# Altium PCB GTU-V1.1-20160516 .PcbDoc (part 3 of 4)
Units mil, origin at the board's own origin, x right, y up, seen from the top; angles counter-clockwise.
Board outline 6299.21 x 4330.71 mil, 4 copper layers (Top Layer, POWER, GND, Bottom Layer); 208 components, 165 nets, 695 pads, 347 vias.
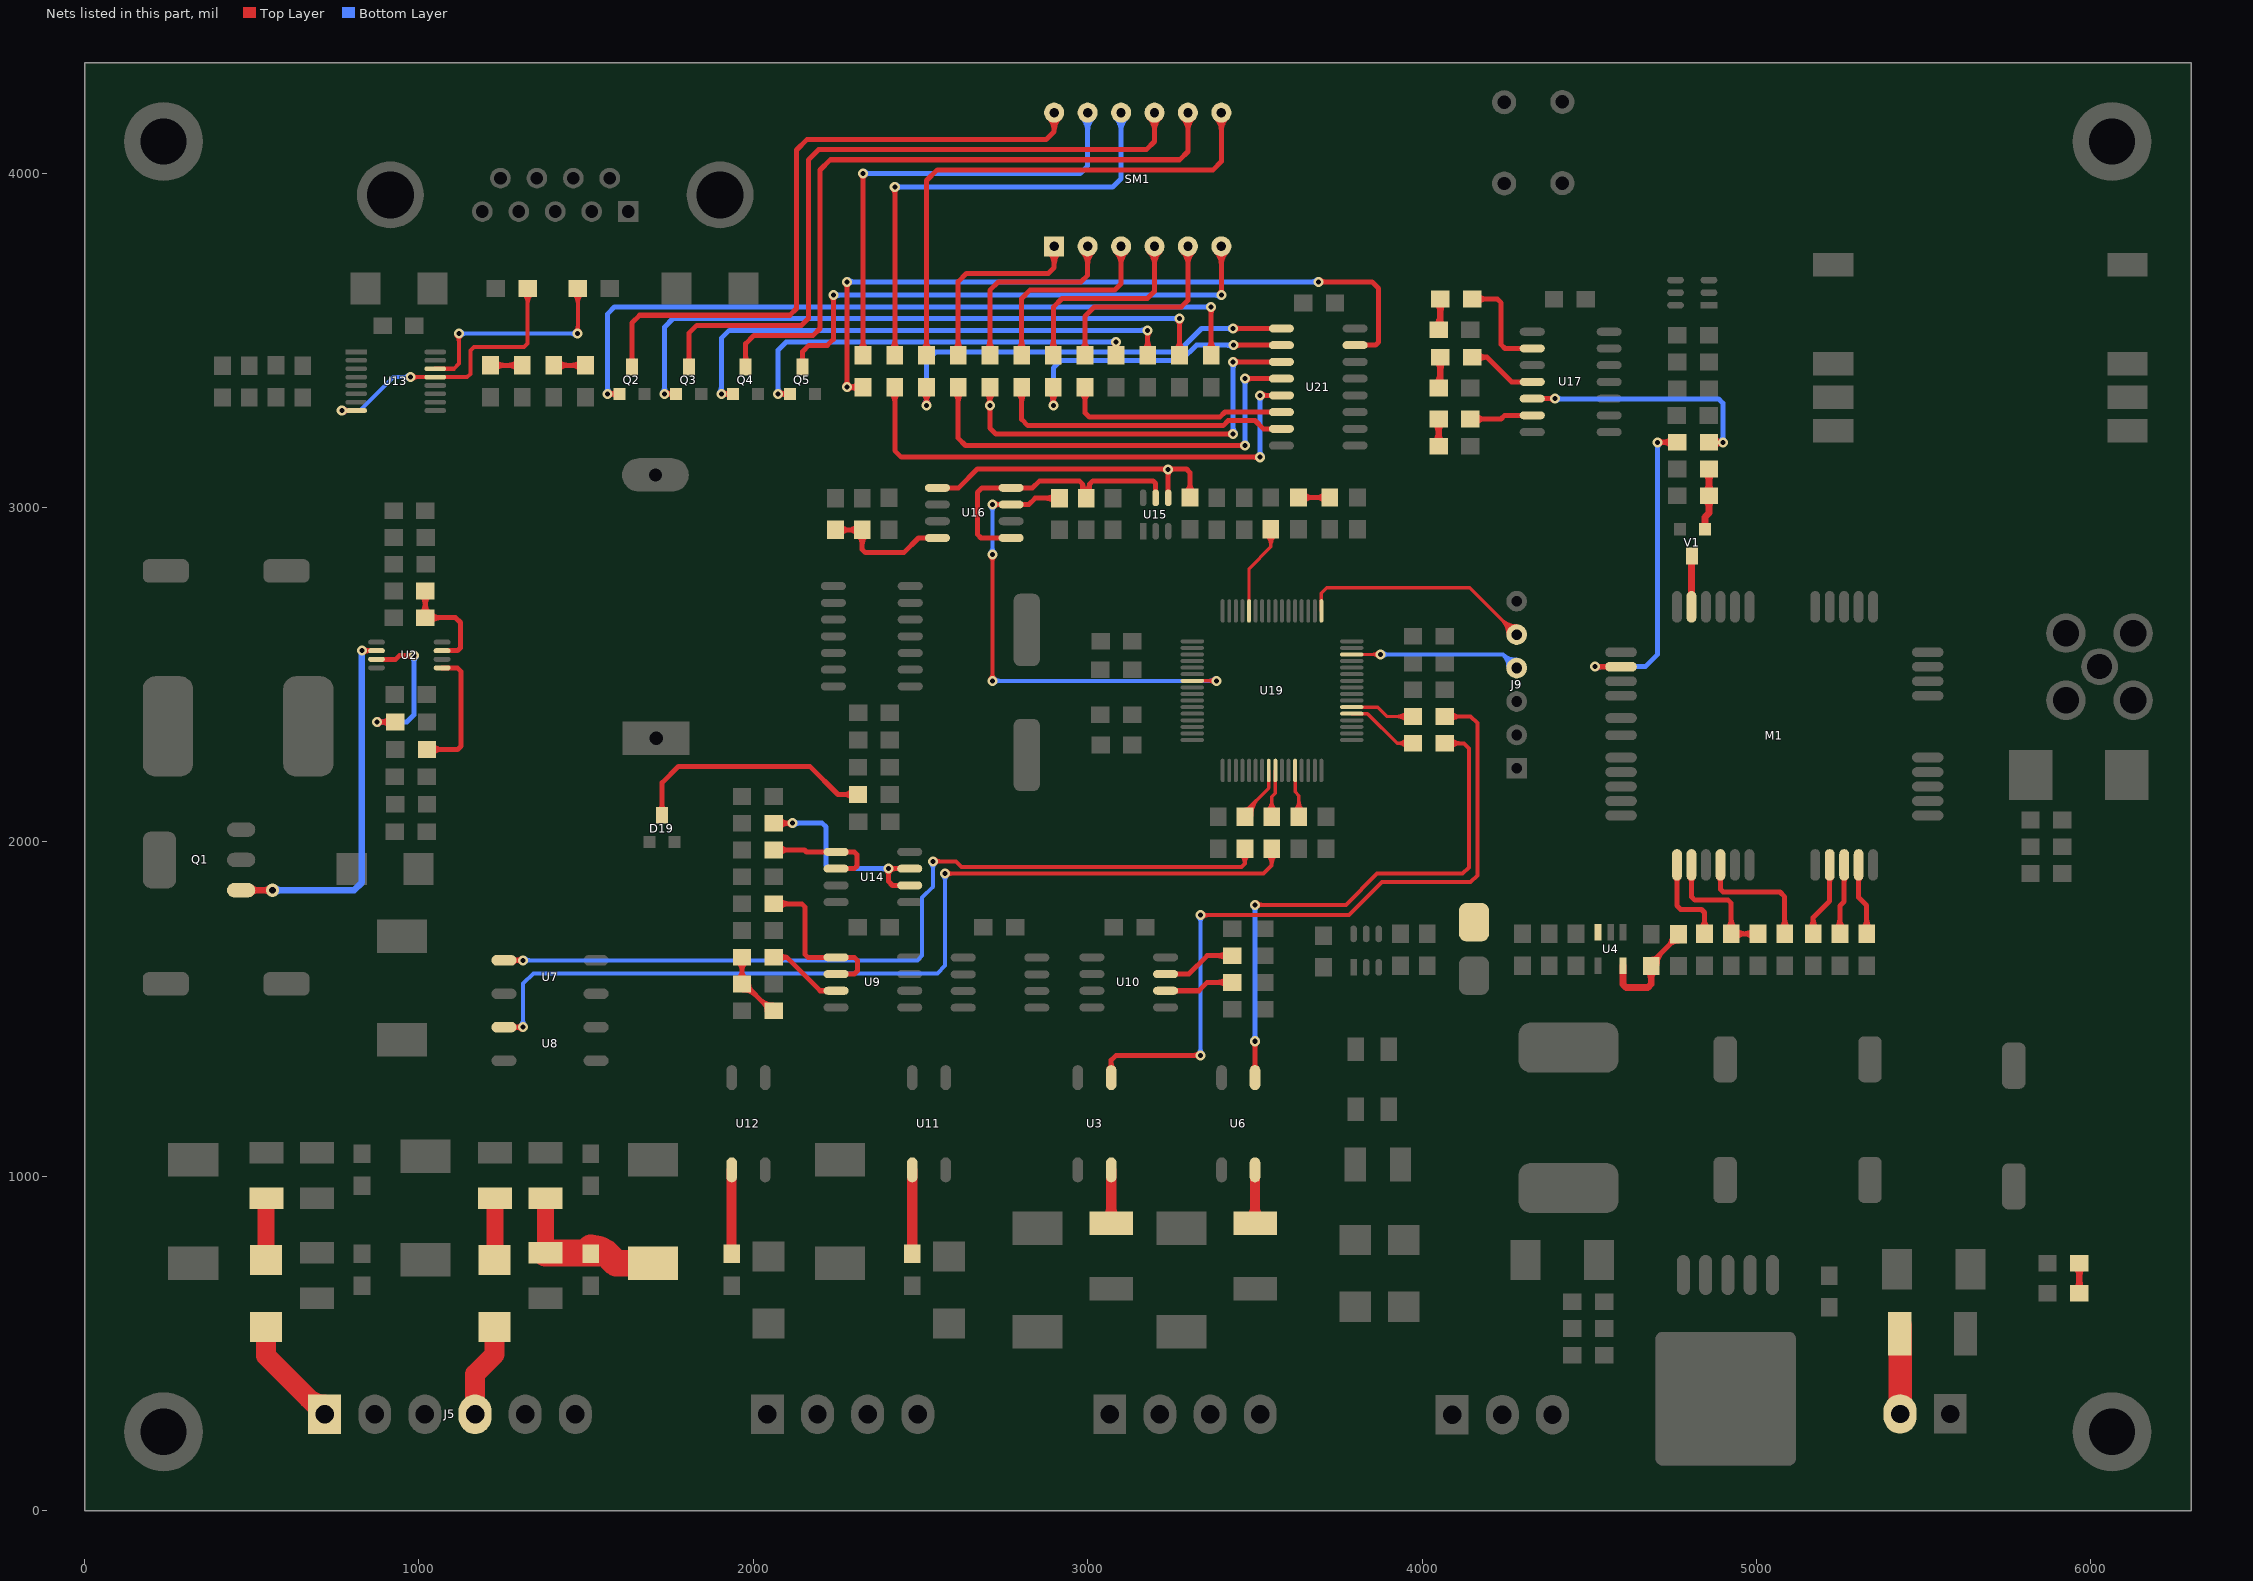
[diagram p5: the nets of this part, all layers, seen from the top]

## Via types
v1: diameter 30, hole 15, Top Layer to Bottom Layer, 261 vias
v2: diameter 40, hole 20, Top Layer to Bottom Layer, 39 vias
v3: diameter 40, hole 40, Top Layer to Bottom Layer, 16 vias
v4: diameter 80, hole 40, Top Layer to Bottom Layer, 14 vias
v5: diameter 50, hole 25, Top Layer to Bottom Layer, 9 vias
v6: diameter 60, hole 30, Top Layer to Bottom Layer, 7 vias
v7: diameter 70, hole 35, Top Layer to Bottom Layer, 1 vias

## Nets (pads, with @x,y where several pads share a name; then routed paths per layer and width w, separated by ;. In a path a pad name is that pad's centre, name@x,y a point inside that pad or via, vN(x,y) a via of type N, cw(c..) or ccw(c..) an arc to the next point about the centre after c; other vN are vias at no path point) (continued)
NetD16_A: D16.A R33.2 | length 259.8
  Top Layer w50: D16.A@528.46,764.14 ccw(c494.31,798.28) 542.6,798.28 ccw(c590.88,798.28) D16.A@556.74,764.14 ; D16.A@542.6,750 R33.2@542.6,934
NetD16_K: D16.K J5.1 | length 389.3
  Top Layer w60: D16.K@542.6,550 542.6,463.55 J5.1@717.76,288.39 ; 668.16,337.99 ccw(c717.76,387.59) J5.1@717.76,317.44
NetD17_A: D17.A R34.2 | length 259.8
  Top Layer w50: D17.A@1212.06,764.14 ccw(c1175.5,800.7) 1227.2,800.7 ; D17.A@1227.2,751 R34.2@1227.2,935 ; 1227.2,795.87 ccw(c1272.07,795.87) D17.A@1240.34,764.14
NetD17_K: D17.K J5.4 | length 246.4
  Top Layer w60: J5.4@1167.76,327.76 1167.76,408.55 1226.2,466.99 D17.K@1226.2,550
NetD18_K: D18.K R37.1 R38.2 R40.2 | length 629.6
  Top Layer w30: R37.1@1378.4,771 R37.1@1381.4,768
  Top Layer w50: R37.1@1378.4,771 R40.2@1378.4,935
  Top Layer w80: R37.1@1378.4,771 1559,771 1590,740 D18.K@1700.21,740 ; R38.2@1513.6,780.5 cw(c1513.6,693.83) 1574.89,755.11 ; R38.2@1513.6,785.5 cw(c1513.6,710.9) 1566.35,763.65
NetD19_3: D19.3 R77.2 | length 844.2
  Top Layer w15: D19.3@1719.79,2094.42 ccw(c1701.86,2112.35) 1727.21,2112.35 ccw(c1752.56,2112.35) D19.3@1734.64,2094.42 ; D19.3@1727.21,2080 1727.21,2177.21 1776,2226 2169,2226 2253,2142 R77.2@2313,2142 ; R77.2@2298.13,2129.63 ccw(c2268.25,2099.75) 2268.25,2142 ccw(c2268.25,2184.25) R77.2@2298.13,2154.37
NetJ1_2: J1.2 PTC1.1 | length 224.2
  Top Layer w70: J1.2@5429.05,328.76 PTC1.1@5429.05,553
NetJ9_4: J9.4 U19.46 | length 669.7
  Top Layer w10: U19.46@3789.61,2560.63 v1(3875.37,2560.63) ; v1@3868.3,2553.56 ccw(c3851.23,2536.49) 3851.23,2560.63 ccw(c3851.23,2584.77) v1@3868.3,2567.7
  Bottom Layer w12: v1(3875.37,2560.63) 4241.97,2560.63 ; v1@3881.73,2554.27 cw(c3897.1,2538.9) 3897.1,2560.63 cw(c3897.1,2582.36) v1@3881.73,2566.99 ; J9.4@4257.61,2520.89 ccw(c4204.12,2522.78) 4241.97,2560.63 ; J9.4@4281.71,2544.98 cw(c4279.82,2598.48) 4241.97,2560.63 ; J9.4@4282.6,2520 4241.97,2560.63
NetJ9_5: J9.5 U19.49 | length 860.7
  Top Layer w10: U19.49@3698.74,2690.87 3698.74,2743.74 3715,2760 4142.6,2760 J9.5@4282.6,2620 ; J9.5@4256.6,2620 ccw(c4193.83,2620) 4238.21,2664.38 ccw(c4282.6,2708.77) J9.5@4282.6,2646 ; J9.5@4266.6,2620 ccw(c4227.97,2620) 4255.28,2647.31 ccw(c4282.6,2674.63) J9.5@4282.6,2636
NetL3_1: L3.1 U4.3
NetLED1_1: LED1.1 R2.2 | length 203.8
  Top Layer w20: R2.2@5954.39,660.61 ccw(c5928.79,686.21) 5965,686.21 ccw(c6001.21,686.21) R2.2@5975.61,660.61 ; LED1.1@5954.39,729.39 cw(c5928.79,703.79) 5965,703.79 cw(c6001.21,703.79) LED1.1@5975.61,729.39 ; R2.2@5965,650 LED1.1@5965,740
NetLED2_1: LED2.1 R27.1 | length 227.6
  Top Layer w15: LED2.1@1403.38,3425 R27.1@1498.21,3425 ; LED2.1@1415.75,3412.63 cw(c1445.63,3382.75) 1445.63,3425 cw(c1445.63,3467.25) LED2.1@1415.75,3437.37 ; R27.1@1485.84,3412.63 ccw(c1455.96,3382.75) 1455.96,3425 ccw(c1455.96,3467.25) R27.1@1485.84,3437.37
NetLED3_1: LED3.1 R28.1 | length 227.6
  Top Layer w15: LED3.1@1213.71,3425 R28.1@1308.55,3425 ; LED3.1@1226.09,3412.63 cw(c1255.96,3382.75) 1255.96,3425 cw(c1255.96,3467.25) LED3.1@1226.09,3437.37 ; R28.1@1296.17,3412.63 ccw(c1266.3,3382.75) 1266.3,3425 ccw(c1266.3,3467.25) R28.1@1296.17,3437.37
NetLED4_1: LED4.1 U17.4 | length 276.1
  Top Layer w15: LED4.1@4149.21,3449.61 4193.6,3449.61 ; LED4.1@4164.16,3437.32 cw(c4193.6,3408.24) 4193.6,3449.61 ; LED4.1@4164.16,3461.91 ccw(c4193.6,3490.98) 4193.6,3449.61 ; U17.4@4329.21,3375.61 4267.6,3375.61 4193.6,3449.61
NetLED4_2: LED4.2 R58.1 | length 207.8
  Top Layer w20: R58.1@4041.11,3368.22 ccw(c4009.46,3399.86) 4054.21,3399.86 ; LED4.2@4043.61,3439.01 cw(c4018,3413.4) 4054.21,3413.4 cw(c4090.43,3413.4) LED4.2@4064.82,3439.01 ; R58.1@4049.21,3357.61 4054.21,3362.61 LED4.2@4054.21,3449.61 ; 4054.21,3387.79 ccw(c4081.89,3387.79) R58.1@4062.32,3368.22
NetLED5_1: LED5.1 U17.2 | length 380.9
  Top Layer w15: LED5.1@4149.21,3623.61 4224.6,3623.61 4236.21,3612 4236.21,3487 4247.6,3475.61 U17.2@4329.21,3475.61 ; LED5.1@4164.09,3611.24 cw(c4193.96,3581.37) 4193.96,3623.61 cw(c4193.96,3665.86) LED5.1@4164.09,3635.99
NetLED5_2: LED5.2 R59.1 | length 207.8
  Top Layer w20: R59.1@4041.11,3542.22 ccw(c4009.46,3573.86) 4054.21,3573.86 ; LED5.2@4043.61,3613.01 cw(c4018,3587.4) 4054.21,3587.4 cw(c4090.43,3587.4) LED5.2@4064.82,3613.01 ; R59.1@4049.21,3531.61 4054.21,3536.61 LED5.2@4054.21,3623.61 ; 4054.21,3561.79 ccw(c4081.89,3561.79) R59.1@4062.32,3542.22
NetLED6_1: LED6.1 R57.2 | length 194.8
  Top Layer w20: R57.2@4038.61,3194.22 ccw(c4013,3219.83) 4049.21,3219.83 ccw(c4085.43,3219.83) R57.2@4059.82,3194.22 ; LED6.1@4038.61,3254.01 cw(c4013,3228.4) 4049.21,3228.4 cw(c4085.43,3228.4) LED6.1@4059.82,3254.01 ; R57.2@4049.21,3183.61 LED6.1@4049.21,3264.61
NetLED6_2: LED6.2 U17.6 | length 255.9
  Top Layer w15: LED6.2@4144.21,3264.61 4235.83,3264.61 4246.83,3275.61 U17.6@4329.21,3275.61 ; LED6.2@4159.09,3252.24 cw(c4188.96,3222.37) 4188.96,3264.61 cw(c4188.96,3306.86) LED6.2@4159.09,3276.99
NetLED7_1: LED7.1 R71.1 | length 226.5
  Top Layer w15: LED7.1@3630.1,3030 R71.1@3723.85,3030 ; LED7.1@3642.47,3017.63 cw(c3672.35,2987.75) 3672.35,3030 cw(c3672.35,3072.25) LED7.1@3642.47,3042.37 ; R71.1@3711.47,3017.63 ccw(c3681.6,2987.75) 3681.6,3030 ccw(c3681.6,3072.25) R71.1@3711.47,3042.37
NetM1_10: M1.10 V1.3 | length 174.3
  Top Layer w20: M1.10@4805.29,2703 4805.29,2852.69 V1.3@4807.6,2855 ; 4805.29,2823.12 cw(c4832.48,2823.12) V1.3@4813.26,2842.34
NetM1_13: M1.13 R56.1 | length 1181.8
  Top Layer w15: v1@4516.21,2523.87 M1.13@4594.66,2523.87 ; v1@4521.52,2518.7 cw(c4534,2506.22) 4534,2523.87 ; v1@4521.52,2529.3 ccw(c4534.64,2542.43) 4534.64,2523.87 ; M1.13@4557.04,2518.73 ccw(c4544.64,2506.33) 4544.64,2523.87 ccw(c4544.64,2541.4) M1.13@4557.04,2529 ; v1(4704.21,3195) R56.1@4762.6,3195 ; v1@4709.52,3189.7 cw(c4722.32,3176.89) 4722.32,3195 cw(c4722.32,3213.11) v1@4709.52,3200.3 ; R56.1@4747.72,3182.63 ccw(c4717.85,3152.75) 4717.85,3195 ccw(c4717.85,3237.25) R56.1@4747.72,3207.37
  Bottom Layer w15: v1(4516.21,2524) 4667.21,2524 4704.21,2561 v1(4704.21,3195) ; v1@4521.52,2518.7 cw(c4534.32,2505.89) 4534.32,2524 cw(c4534.32,2542.11) v1@4521.52,2529.3 ; v1@4698.91,3189.7 cw(c4686.11,3176.89) 4704.21,3176.89 cw(c4722.32,3176.89) v1@4709.52,3189.7
NetM1_21: M1.21 R52.1 | length 370.6
  Top Layer w15: M1.21@4756.85,1893.73 cw(c4744.45,1881.33) 4761.98,1881.33 cw(c4779.52,1881.33) M1.21@4767.12,1893.73 ; M1.21@4761.98,1931.35 4761.98,1809.23 4773.21,1798 4835.21,1798 4844.21,1789 R52.1@4844.21,1725 ; R52.1@4831.84,1739.87 ccw(c4801.96,1769.75) 4844.21,1769.75 ccw(c4886.46,1769.75) R52.1@4856.59,1739.87
NetM1_22: M1.22 R51.1 R54.2 | length 620.8
  Top Layer w15: M1.22@4800.16,1893.73 cw(c4787.75,1881.33) 4805.29,1881.33 cw(c4822.83,1881.33) M1.22@4810.43,1893.73 ; M1.22@4805.29,1931.35 4805.29,1835.92 4815.21,1826 4915.21,1826 4924.21,1817 R54.2@4924.21,1725 R51.1@5004.21,1725 ; R54.2@4911.84,1739.87 ccw(c4881.96,1769.75) 4924.21,1769.75 ccw(c4966.46,1769.75) R54.2@4936.59,1739.87 ; R54.2@4936.59,1712.63 cw(c4966.46,1682.75) 4966.46,1725 cw(c4966.46,1767.25) R54.2@4936.59,1737.37 ; R51.1@4991.84,1712.63 ccw(c4961.96,1682.75) 4961.96,1725 ccw(c4961.96,1767.25) R51.1@4991.84,1737.37
NetM1_24: M1.24 R50.1 | length 479.5
  Top Layer w15: M1.24@4886.77,1893.73 cw(c4874.37,1881.33) 4891.91,1881.33 cw(c4909.44,1881.33) M1.24@4897.04,1893.73 ; M1.24@4891.91,1931.35 4891.91,1858.31 4899.91,1850.31 5069.91,1850.31 5084.21,1836 R50.1@5084.21,1725 ; R50.1@5071.84,1739.87 ccw(c5041.96,1769.75) 5084.21,1769.75 ccw(c5126.46,1769.75) R50.1@5096.59,1739.87
NetM1_28: M1.28 R48.1 | length 320.7
  Top Layer w15: R48.1@5156.84,1739.87 ccw(c5126.96,1769.75) 5169.21,1769.75 ccw(c5211.46,1769.75) R48.1@5181.59,1739.87 ; R48.1@5169.21,1725 5169.21,1774 5218.68,1823.46 M1.28@5218.68,1931.35 ; M1.28@5213.54,1893.73 cw(c5201.14,1881.33) 5218.68,1881.33 cw(c5236.21,1881.33) M1.28@5223.81,1893.73
NetM1_29: M1.29 R45.1 | length 305.5
  Top Layer w15: R45.1@5236.84,1739.87 ccw(c5206.96,1769.75) 5249.21,1769.75 ccw(c5291.46,1769.75) R45.1@5261.59,1739.87 ; R45.1@5249.21,1725 5249.21,1809 5261.98,1821.77 M1.29@5261.98,1931.35 ; M1.29@5256.85,1893.73 cw(c5244.45,1881.33) 5261.98,1881.33 cw(c5279.52,1881.33) M1.29@5267.12,1893.73
NetM1_30: M1.30 R42.1 | length 310.2
  Top Layer w15: M1.30@5300.16,1893.73 cw(c5287.75,1881.33) 5305.29,1881.33 cw(c5322.83,1881.33) M1.30@5310.43,1893.73 ; M1.30@5305.29,1931.35 5305.29,1833.92 5329.21,1810 R42.1@5329.21,1725 ; R42.1@5316.84,1739.87 ccw(c5286.96,1769.75) 5329.21,1769.75 ccw(c5371.46,1769.75) R42.1@5341.59,1739.87
NetPTC2_1: PTC2.1 U3.6 | length 235.3
  Top Layer w30: PTC2.1@3056.07,874.14 ccw(c3021.93,908.28) 3070.21,908.28 ccw(c3118.5,908.28) PTC2.1@3084.35,874.14 ; PTC2.1@3070.21,860 U3.6@3070.21,1019.41
NetPTC3_1: PTC3.1 U6.6 | length 235.3
  Top Layer w30: PTC3.1@3486.07,874.14 ccw(c3451.93,908.28) 3500.21,908.28 ccw(c3548.5,908.28) PTC3.1@3514.35,874.14 ; PTC3.1@3500.21,860 U6.6@3500.21,1019.41
NetQ1_1: Q1.1 U2.6 | length 1255.7
  Top Layer w15: v1(829.42,2571.8) U2.6@873.21,2571.8 ; v1@834.72,2566.49 cw(c847.52,2553.69) 847.52,2571.8 cw(c847.52,2589.9) v1@834.72,2577.1
  Top Layer w20: Q1.1@468.31,1855.61 v2(562.21,1855.61) ; Q1.1@497.22,1847.37 cw(c517.11,1827.48) 517.11,1855.61 cw(c517.11,1883.75) Q1.1@497.22,1863.85 ; v2@555.14,1848.54 ccw(c538.07,1831.47) 538.07,1855.61 ccw(c538.07,1879.76) v2@555.14,1862.69
  Bottom Layer w20: v2(562.21,1855.61) 805.83,1855.61 829.42,1879.2 v1(829.42,2571.8) ; v2@569.28,1848.54 cw(c586.35,1831.47) 586.35,1855.61 cw(c586.35,1879.76) v2@569.28,1862.69
NetQ2_1: Q2.1 R62.2 | length 2452.8
  Top Layer w15: v1(1564.21,3340) Q2.1@1599.21,3340 ; v1@1569.52,3334.7 cw(c1582.32,3321.89) 1582.32,3340 cw(c1582.32,3358.11) v1@1569.52,3345.3 ; Q2.1@1591.79,3332.58 ccw(c1573.86,3314.65) 1573.86,3340 ccw(c1573.86,3365.35) Q2.1@1591.79,3347.42 ; R62.2@3356.84,3469.87 ccw(c3326.96,3499.75) 3369.21,3499.75 ccw(c3411.46,3499.75) R62.2@3381.59,3469.87 ; v1@3363.91,3594.7 cw(c3351.11,3581.89) 3369.21,3581.89 cw(c3387.32,3581.89) v1@3374.52,3594.7 ; R62.2@3369.21,3455 v1(3369.21,3600)
  Bottom Layer w15: v1@1558.91,3345.3 ccw(c1546.11,3358.11) 1564.21,3358.11 ccw(c1582.32,3358.11) v1@1569.52,3345.3 ; v1(1564.21,3340) 1564.21,3579.21 1585,3600 v1(3369.21,3600) ; v1@3363.91,3594.7 ccw(c3351.11,3581.89) 3351.11,3600 ccw(c3351.11,3618.11) v1@3363.91,3605.3
NetQ2_3: Q2.3 SM1.12 | length 2090.9
  Top Layer w15: Q2.3@1629.79,3434.42 ccw(c1611.86,3452.35) 1637.21,3452.35 ccw(c1662.56,3452.35) Q2.3@1644.64,3434.42 ; Q2.3@1637.21,3420 1637.21,3552.21 1660,3575 2109,3575 2129.21,3595.21 2129.21,4069.21 2160,4100 2875,4100 2899.6,4124.6 SM1.12@2899.6,4181 ; SM1.12@2883.69,4165.09 cw(c2845.28,4126.68) 2899.6,4126.68 cw(c2953.92,4126.68) SM1.12@2915.51,4165.09
NetQ3_1: Q3.1 R63.2 | length 2114.8
  Top Layer w15: v1(1734.21,3340) Q3.1@1769.21,3340 ; v1@1739.52,3334.7 cw(c1752.32,3321.89) 1752.32,3340 cw(c1752.32,3358.11) v1@1739.52,3345.3 ; Q3.1@1761.79,3332.58 ccw(c1743.86,3314.65) 1743.86,3340 ccw(c1743.86,3365.35) Q3.1@1761.79,3347.42 ; R63.2@3261.84,3469.87 ccw(c3231.96,3499.75) 3274.21,3499.75 ccw(c3316.46,3499.75) R63.2@3286.59,3469.87 ; v1@3268.91,3559.7 cw(c3256.11,3546.89) 3274.21,3546.89 cw(c3292.32,3546.89) v1@3279.52,3559.7 ; R63.2@3274.21,3455 v1(3274.21,3565)
  Bottom Layer w15: v1@1728.91,3345.3 ccw(c1716.11,3358.11) 1734.21,3358.11 ccw(c1752.32,3358.11) v1@1739.52,3345.3 ; v1(1734.21,3340) 1734.21,3539.21 1760,3565 v1(3274.21,3565) ; v1@3268.91,3559.7 ccw(c3256.11,3546.89) 3256.11,3565 ccw(c3256.11,3583.11) v1@3268.91,3570.3
NetQ3_3: Q3.3 SM1.9 | length 2220.3
  Top Layer w15: Q3.3@1799.79,3434.42 ccw(c1781.86,3452.35) 1807.21,3452.35 ccw(c1832.56,3452.35) Q3.3@1814.64,3434.42 ; Q3.3@1807.21,3420 1807.21,3521.21 1831,3545 2144,3545 2164.21,3565.21 2164.21,4039.21 2195,4070 3175,4070 3199.6,4094.6 SM1.9@3199.6,4181 ; SM1.9@3183.69,4165.09 cw(c3145.28,4126.68) 3199.6,4126.68 cw(c3253.92,4126.68) SM1.9@3215.51,4165.09
NetQ4_1: Q4.1 R69.2 | length 1781
  Top Layer w15: v1(1904.21,3340) Q4.1@1939.21,3340 ; v1@1909.52,3334.7 cw(c1922.32,3321.89) 1922.32,3340 cw(c1922.32,3358.11) v1@1909.52,3345.3 ; Q4.1@1931.79,3332.58 ccw(c1913.86,3314.65) 1913.86,3340 ccw(c1913.86,3365.35) Q4.1@1931.79,3347.42 ; R69.2@3166.84,3469.87 ccw(c3136.96,3499.75) 3179.21,3499.75 ccw(c3221.46,3499.75) R69.2@3191.59,3469.87 ; v1@3173.91,3524.7 cw(c3161.11,3511.89) 3179.21,3511.89 cw(c3197.32,3511.89) v1@3184.52,3524.7 ; R69.2@3179.21,3455 v1(3179.21,3530)
  Bottom Layer w15: v1@1898.91,3345.3 ccw(c1886.11,3358.11) 1904.21,3358.11 ccw(c1922.32,3358.11) v1@1909.52,3345.3 ; v1(1904.21,3340) 1904.21,3506.21 1928,3530 v1(3179.21,3530) ; v1@3173.91,3524.7 ccw(c3161.11,3511.89) 3161.11,3530 ccw(c3161.11,3548.11) v1@3173.91,3535.3
NetQ4_3: Q4.3 SM1.8 | length 2149.7
  Top Layer w15: Q4.3@1969.79,3434.42 ccw(c1951.86,3452.35) 1977.21,3452.35 ccw(c2002.56,3452.35) Q4.3@1984.64,3434.42 ; Q4.3@1977.21,3420 1977.21,3490.21 2002,3515 2179,3515 2199.21,3535.21 2199.21,4009.21 2230,4040 3275,4040 3299.6,4064.6 SM1.8@3299.6,4181 ; SM1.8@3283.69,4165.09 cw(c3245.28,4126.68) 3299.6,4126.68 cw(c3353.92,4126.68) SM1.8@3315.51,4165.09
NetQ5_1: Q5.1 R74.2 | length 1434.5
  Top Layer w15: v1(2074.21,3340) Q5.1@2109.21,3340 ; v1@2079.52,3334.7 cw(c2092.32,3321.89) 2092.32,3340 cw(c2092.32,3358.11) v1@2079.52,3345.3 ; Q5.1@2101.79,3332.58 ccw(c2083.86,3314.65) 2083.86,3340 ccw(c2083.86,3365.35) Q5.1@2101.79,3347.42 ; R74.2@3072.97,3470.91 ccw(c3052.79,3495) v1(3084.21,3495) ; v1@3078.91,3489.7 cw(c3066.11,3476.89) 3084.21,3476.89 cw(c3102.32,3476.89) v1@3089.52,3489.7 ; R74.2@3084.21,3455 v1(3084.21,3495) ; R74.2@3095.45,3470.91 cw(c3115.64,3495) v1(3084.21,3495)
  Bottom Layer w15: v1@2068.91,3345.3 ccw(c2056.11,3358.11) 2074.21,3358.11 ccw(c2092.32,3358.11) v1@2079.52,3345.3 ; v1(2074.21,3340) 2074.21,3471.21 2098,3495 v1(3084.21,3495) ; v1@3078.91,3489.7 ccw(c3066.11,3476.89) 3066.11,3495 ccw(c3066.11,3513.11) v1@3078.91,3500.3
NetQ5_3: Q5.3 SM1.6 | length 1815.6
  Top Layer w15: Q5.3@2139.79,3434.42 ccw(c2121.86,3452.35) 2147.21,3452.35 ccw(c2172.56,3452.35) Q5.3@2154.64,3434.42 ; Q5.3@2147.21,3420 2147.21,3466.21 2166,3485 2221,3485 2239.21,3503.21 v1(2239.21,3635) ; v1@2233.91,3629.7 cw(c2221.11,3616.89) 2239.21,3616.89 cw(c2257.32,3616.89) v1@2244.52,3629.7 ; SM1.6@3383.69,3765.09 cw(c3345.28,3726.68) 3399.6,3726.68 cw(c3453.92,3726.68) SM1.6@3415.51,3765.09 ; v1@3394.3,3640.3 ccw(c3381.49,3653.11) 3399.6,3653.11 ccw(c3417.7,3653.11) v1@3404.9,3640.3 ; v1(3399.6,3635) SM1.6@3399.6,3781
  Bottom Layer w15: v1@2244.52,3629.7 cw(c2257.32,3616.89) 2257.32,3635 cw(c2257.32,3653.11) v1@2244.52,3640.3 ; 2254.21,3635 v1(3399.6,3635) ; v1@3394.3,3629.7 ccw(c3381.49,3616.89) 3381.49,3635 ccw(c3381.49,3653.11) v1@3394.3,3640.3
NetR3_1: R3.1 U2.1 | length 456.5
  Top Layer w15: R3.1@1024.21,2276.61 1115.83,2276.61 1126.21,2287 1126.21,2509 1114.6,2520.61 U2.1@1069.21,2520.61 ; R3.1@1039.09,2264.24 cw(c1068.96,2234.37) 1068.96,2276.61 cw(c1068.96,2318.86) R3.1@1039.09,2288.99
NetR4_1: R4.1 R6.2 U2.3 | length 524.2
  Top Layer w15: R6.2@1006.84,2682.99 ccw(c976.96,2712.86) 1019.21,2712.86 ccw(c1061.46,2712.86) R6.2@1031.59,2682.99 ; R4.1@1006.84,2738.24 cw(c976.96,2708.37) 1019.21,2708.37 cw(c1061.46,2708.37) R4.1@1031.59,2738.24 ; R4.1@1019.21,2750.61 R6.2@1019.21,2670.61 1109.6,2670.61 1124.21,2656 1124.21,2580.61 1115.39,2571.8 U2.3@1069.21,2571.8 ; R6.2@1034.09,2658.24 cw(c1063.96,2628.37) 1063.96,2670.61 cw(c1063.96,2712.86) R6.2@1034.09,2682.99
NetR7_2: R7.2 U2.7 | length 653.2
  Top Layer w15: v1@871.83,2358.61 R7.2@929.21,2358.61 ; U2.7@873.21,2546.2 930.42,2546.2 941.21,2557 v1(985.21,2557) ; v1@880.13,2353.31 cw(c892.93,2340.51) 892.93,2358.61 cw(c892.93,2376.72) v1@880.13,2363.92 ; R7.2@914.34,2346.24 ccw(c884.46,2316.37) 884.46,2358.61 ccw(c884.46,2400.86) R7.2@914.34,2370.99 ; v1@979.91,2551.7 ccw(c967.11,2538.89) 967.11,2557 ccw(c967.11,2575.11) v1@979.91,2562.3
  Bottom Layer w15: v1@871.83,2358.61 963.83,2358.61 985.21,2380 v1(985.21,2557) ; v1@880.13,2353.31 cw(c892.93,2340.51) 892.93,2358.61 cw(c892.93,2376.72) v1@880.13,2363.92 ; v1@979.91,2551.7 cw(c967.11,2538.89) 985.21,2538.89 cw(c1003.32,2538.89) v1@990.52,2551.7
  other v1: 874.83,2358.61
NetR10_2: R10.2 U3.1 | length 2418.2
  Top Layer w12: v1(3337,1781) 3781,1781 3880,1880 4145,1880 4165,1900 4165,2355 4145,2375 R10.2@4067.6,2375 ; v1@3343.36,1774.64 cw(c3358.73,1759.27) 3358.73,1781 cw(c3358.73,1802.73) v1@3343.36,1787.36 ; R10.2@4083.53,2361.56 cw(c4115.97,2329.13) 4115.97,2375 cw(c4115.97,2420.87) R10.2@4083.53,2388.44
  Top Layer w15: U3.1@3064.2,1322.51 ccw(c3049.69,1337.02) 3070.21,1337.02 ccw(c3090.73,1337.02) U3.1@3076.22,1322.51 ; U3.1@3070.21,1295 3070.21,1347.21 3085,1362 v1(3337,1362) ; v1@3331.7,1356.7 ccw(c3318.89,1343.89) 3318.89,1362 ccw(c3318.89,1380.11) v1@3331.7,1367.3
  Bottom Layer w12: v1@3330.64,1368.36 ccw(c3315.27,1383.73) 3337,1383.73 ccw(c3358.73,1383.73) v1@3343.36,1368.36 ; v1@3330.64,1774.64 cw(c3315.27,1759.27) 3337,1759.27 cw(c3358.73,1759.27) v1@3343.36,1774.64 ; v1(3337,1362) v1@3337,1782
NetR11_2: R11.2 R12.1 U4.5 | length 520
  Top Layer w15: R11.2@4685,1637.79 R12.1@4766.21,1719 ; R11.2@4685,1649 ccw(c4685,1676.07) 4704.14,1656.93 ; R11.2@4702.5,1631.5 cw(c4759.93,1631.5) 4719.32,1672.11 ; 4734.57,1687.36 ccw(c4700.43,1721.5) R12.1@4748.71,1721.5 ; 4740.61,1693.39 cw(c4766.21,1667.79) R12.1@4766.21,1704
  Top Layer w20: U4.5@4600.83,1629.78 4600.83,1574.17 4610,1565 4675,1565 4685,1575 R11.2@4685,1642.79 ; R11.2@4674.39,1615.89 cw(c4648.79,1590.29) 4685,1590.29 cw(c4721.21,1590.29) R11.2@4695.61,1615.89
NetR13_2: R13.2 U6.1 | length 1861.5
  Top Layer w12: v1(3500.21,1812) 3772,1812 3865,1905 4121,1905 4140,1924 4140,2280 4125,2295 R13.2@4067.6,2295 ; v1@3506.58,1805.64 cw(c3521.94,1790.27) 3521.94,1812 cw(c3521.94,1833.73) v1@3506.58,1818.36 ; R13.2@4083.53,2281.56 cw(c4115.97,2249.13) 4115.97,2295 cw(c4115.97,2340.87) R13.2@4083.53,2308.44
  Top Layer w15: U6.1@3494.2,1322.51 ccw(c3479.69,1337.02) 3500.21,1337.02 ccw(c3520.73,1337.02) U6.1@3506.22,1322.51 ; v1@3494.91,1398.7 cw(c3482.11,1385.89) 3500.21,1385.89 cw(c3518.32,1385.89) v1@3505.52,1398.7 ; U6.1@3500.21,1295 v1(3500.21,1404)
  Bottom Layer w15: v1@3494.91,1409.3 ccw(c3482.11,1422.11) 3500.21,1422.11 ccw(c3518.32,1422.11) v1@3505.52,1409.3 ; v1@3494.91,1806.7 cw(c3482.11,1793.89) 3500.21,1793.89 cw(c3518.32,1793.89) v1@3505.52,1806.7 ; v1(3500.21,1404) v1(3500.21,1812)
NetR14_2: R14.2 U7.1 | length 2768
  Top Layer w12: v1(2537,1942) 2606,1942 2623,1925 3460,1925 3470,1935 ; v1@2543.36,1935.64 cw(c2558.73,1920.27) 2558.73,1942 cw(c2558.73,1963.73) v1@2543.36,1948.36 ; R14.2@3457.33,1963.34 cw(c3431.97,1935) 3470,1935 ; R14.2@3470,1980 3470,1935 ; R14.2@3482.67,1963.34 ccw(c3508.03,1935) 3470,1935
  Top Layer w15: U7.1@1254.21,1646 v1(1311,1646) ; U7.1@1281.72,1639.99 cw(c1296.23,1625.48) 1296.23,1646 cw(c1296.23,1666.52) U7.1@1281.72,1652.01 ; v1@1305.7,1640.7 ccw(c1292.89,1627.89) 1292.89,1646 ccw(c1292.89,1664.11) v1@1305.7,1651.3
  Bottom Layer w12: v1(1311,1646) 2491,1646 2505,1660 2505,1834 2537,1866 v1(2537,1942) ; v1@1317.36,1639.64 cw(c1332.73,1624.27) 1332.73,1646 cw(c1332.73,1667.73) v1@1317.36,1652.36 ; v1@2530.64,1935.64 cw(c2515.27,1920.27) 2537,1920.27 cw(c2558.73,1920.27) v1@2543.36,1935.64
NetR15_2: R15.2 U8.1 | length 3017.6
  Top Layer w12: v1@2575,1905 3525,1905 3550,1930 R15.2@3550,1980 ; v1@2579.36,1899.64 cw(c2592.31,1886.69) 2592.31,1905 ; v1@2579.36,1912.36 ccw(c2597.14,1930.14) 2597.14,1905 ; R15.2@3536.56,1964.06 cw(c3504.13,1931.63) 3550,1931.63 cw(c3595.87,1931.63) R15.2@3563.44,1964.06
  Top Layer w15: U8.1@1254.21,1446 v1(1311,1446) ; U8.1@1281.72,1439.99 cw(c1296.23,1425.48) 1296.23,1446 cw(c1296.23,1466.52) U8.1@1281.72,1452.01 ; v1@1305.7,1440.7 ccw(c1292.89,1427.89) 1292.89,1446 ccw(c1292.89,1464.11) v1@1305.7,1451.3
  Bottom Layer w12: v1@1304.64,1452.36 ccw(c1289.27,1467.73) 1311,1467.73 ccw(c1332.73,1467.73) v1@1317.36,1452.36 ; v1(1311,1446) 1311,1576 1342,1607 2550,1607 2573,1630 v1(2573,1906) ; v1@2566.64,1899.64 cw(c2551.27,1884.27) 2573,1884.27 cw(c2594.73,1884.27) v1@2579.36,1899.64
NetR16_1: R16.1 R18.2 R92.2 | length 473.6
  Top Layer w15: R18.2@1953.84,1587.37 ccw(c1923.96,1617.25) 1966.21,1617.25 ccw(c2008.46,1617.25) R18.2@1978.59,1587.37 ; R92.2@1953.84,1642.63 cw(c1923.96,1612.75) 1966.21,1612.75 cw(c2008.46,1612.75) R92.2@1978.59,1642.63 ; R18.2@1966.21,1575 R92.2@1966.21,1655 ; R18.2@1966.21,1583 R16.1@2046.21,1503 ; R18.2@1968.71,1557.5 cw(c1968.71,1501.97) 2007.98,1541.24 ; R18.2@1986.21,1575 ccw(c2015.18,1575) 1994.7,1554.51 ; 2021.16,1528.06 ccw(c2058.71,1565.61) R16.1@2058.71,1512.5 ; 2032.02,1517.19 cw(c2009.83,1495) R16.1@2041.21,1495 ; R16.1@2046.21,1495 R16.1@2061.21,1495
NetR17_1: R17.1 U9.1 U9.2 | length 568.5
  Top Layer w15: R17.1@2061.21,1815 2145,1815 2154,1806 2154,1664 2163,1655 2302,1655 2311,1646 2311,1614 2302,1605 U9.2@2247.6,1605 ; R17.1@2076.09,1802.63 cw(c2105.96,1772.75) 2105.96,1815 cw(c2105.96,1857.25) R17.1@2076.09,1827.37
NetR20_2: R20.2 U10.6 | length 276.7
  Top Layer w15: U10.6@3232.6,1555 3332,1555 3357,1580 R20.2@3432.6,1580 ; R20.2@3417.72,1567.63 ccw(c3387.85,1537.75) 3387.85,1580 ccw(c3387.85,1622.25) R20.2@3417.72,1592.37
NetR21_2: R21.2 U10.7 | length 289.1
  Top Layer w15: U10.7@3232.6,1605 3302,1605 3357,1660 R21.2@3432.6,1660 ; R21.2@3417.72,1647.63 ccw(c3387.85,1617.75) 3387.85,1660 ccw(c3387.85,1702.25) R21.2@3417.72,1672.37
NetR24_2: R24.2 U11.1 | length 251.4
  Top Layer w30: R24.2@2475.21,768 U11.1@2475.21,1019.41
NetR25_2: R25.2 U12.1 | length 251.4
  Top Layer w30: R25.2@1935.21,768 U12.1@1935.21,1019.41
NetR31_2: R31.2 U14.1 U14.2 | length 420.7
  Top Layer w15: R31.2@2061.21,1976 2153,1976 2159,1970 2302,1970 2310,1962 2310,1928 2302,1920 U14.2@2247.6,1920 ; R31.2@2076.09,1963.63 cw(c2105.96,1933.75) 2105.96,1976 cw(c2105.96,2018.25) R31.2@2076.09,1988.37
NetR35_2: R35.2 U13.14 | length 865.3
  Top Layer w12: U13.14@1048.71,3415 1104.21,3415 1119.21,3430 v1(1119.21,3520) ; v1@1112.85,3513.64 cw(c1097.48,3498.27) 1119.21,3498.27 cw(c1140.94,3498.27) v1@1125.58,3513.64 ; R35.2@1461.78,3641.56 cw(c1429.34,3609.13) 1475.21,3609.13 cw(c1521.08,3609.13) R35.2@1488.65,3641.56 ; v1@1467.85,3526.36 ccw(c1450.07,3544.14) 1475.21,3544.14 ; v1@1475.21,3520 R35.2@1475.21,3655 ; 1475.21,3539.31 ccw(c1493.53,3539.31) v1@1480.58,3526.36
  Bottom Layer w12: v1(1119.21,3520) v1(1474.21,3520) ; v1@1125.58,3513.64 cw(c1140.94,3498.27) 1140.94,3520 cw(c1140.94,3541.73) v1@1125.58,3526.36 ; v1@1467.85,3513.64 ccw(c1452.48,3498.27) 1452.48,3520 ccw(c1452.48,3541.73) v1@1467.85,3526.36
NetR36_2: R36.2 U13.8 U13.13 | length 1096.3
  Top Layer w12: v1(769.21,3290) U13.8@812.71,3290 ; v1@775.58,3283.64 cw(c790.94,3268.27) 790.94,3290 cw(c790.94,3311.73) v1@775.58,3296.36 ; v1(974.21,3390) 1144.21,3390 1154.21,3400 1154.21,3470 1164.21,3480 1314.21,3480 1325.21,3491 R36.2@1325.21,3655 ; v1@980.58,3383.64 cw(c995.94,3368.27) 995.94,3390 cw(c995.94,3411.73) v1@980.58,3396.36 ; R36.2@1311.78,3641.56 cw(c1279.34,3609.13) 1325.21,3609.13 cw(c1371.08,3609.13) R36.2@1338.65,3641.56
  Bottom Layer w12: v1(769.21,3290) 824.21,3290 924.21,3390 v1(974.21,3390) ; v1@775.58,3283.64 cw(c790.94,3268.27) 790.94,3290 cw(c790.94,3311.73) v1@775.58,3296.36 ; v1@967.85,3383.64 ccw(c952.48,3368.27) 952.48,3390 ccw(c952.48,3411.73) v1@967.85,3396.36
NetR39_2: R39.2 U14.6 U14.7 | length 845.2
  Top Layer w15: R39.2@2061.21,2056 v1(2117,2056) ; R39.2@2076.09,2043.63 cw(c2105.96,2013.75) 2105.96,2056 cw(c2105.96,2098.25) R39.2@2076.09,2068.37 ; v1@2111.7,2050.7 ccw(c2098.89,2037.89) 2098.89,2056 ccw(c2098.89,2074.11) v1@2111.7,2061.3 ; v1@2398.7,1914.7 cw(c2385.89,1901.89) 2404,1901.89 cw(c2422.11,1901.89) 2409.3,1914.7 cw(c2422.11,1901.89) 2422.11,1920 cw(c2422.11,1938.11) v1@2409.3,1925.3 ; U14.6@2467.6,1870 2416,1870 2404,1882 v1(2404,1920) U14.7@2467.6,1920
  Bottom Layer w15: v1(2117,2056) 2206,2056 2217,2045 2217,1930 2227,1920 v1(2404,1920) ; v1@2122.3,2050.7 cw(c2135.11,2037.89) 2135.11,2056 cw(c2135.11,2074.11) v1@2122.3,2061.3 ; v1@2398.7,1914.7 ccw(c2385.89,1901.89) 2385.89,1920 ccw(c2385.89,1938.11) v1@2398.7,1925.3
NetR43_1: R43.1 U15.5 U16.5 U16.8 | length 960.7
  Top Layer w15: U16.5@2770.6,2909 2681,2909 2670,2920 2670,3045 2684,3059 2835,3059 2856,3080 2975,3080 2985,3070 ; R43.1@2989.19,3046.78 ccw(c2980.05,3070) 3005,3070 ; R43.1@2995.6,3028 2993.6,3030 2985,3030 2985,3070 ; R43.1@3001.34,3047.03 cw(c3009.31,3070) 2985,3070 ; R43.1@3010,3035 3005,3040 3005,3070 ; U15.5@3203.1,3029 3203.1,3071.9 3195,3080 3015,3080 3005,3070
NetR44_1: R44.1 U15.4 U16.1 | length 1094.1
  Top Layer w15: U16.1@2550.6,3059 2614,3059 2670,3115 3295,3115 3305.6,3104.4 R44.1@3305.6,3030 ; 3221.05,3115 cw(c3221.05,3094.85) 3235.3,3109.1 cw(c3222.49,3096.3) 3240.6,3096.3 cw(c3258.7,3096.3) 3245.9,3109.1 cw(c3260.15,3094.85) 3260.15,3115 ; 3223.94,3115 ccw(c3223.94,3131.06) v1@3235.3,3119.7 ; U15.4@3240.6,3029 v1(3240.6,3114.4) ; v1@3245.9,3119.7 ccw(c3257.26,3131.06) 3257.26,3115 ; R44.1@3293.22,3044.87 ccw(c3263.35,3074.75) 3305.6,3074.75 ccw(c3347.85,3074.75) R44.1@3317.97,3044.87
NetR47_1: R47.1 R49.2 U16.4 | length 584.8
  Top Layer w15: R49.2@2245.6,2933 R47.1@2325.6,2933 2325.6,2874.4 2335,2865 2450,2865 2494,2909 U16.4@2550.6,2909 ; R49.2@2257.97,2920.63 cw(c2287.85,2890.75) 2287.85,2933 cw(c2287.85,2975.25) R49.2@2257.97,2945.37 ; R47.1@2313.22,2918.13 cw(c2283.35,2888.25) 2325.6,2888.25 cw(c2367.85,2888.25) R47.1@2337.97,2918.13 ; R47.1@2313.22,2920.63 ccw(c2283.35,2890.75) 2283.35,2933 ccw(c2283.35,2975.25) R47.1@2313.22,2945.37
NetR53_2: R53.2 R55.1 V1.1 | length 386
  Top Layer w20: V1.1@4839.94,2940.66 ccw(c4826.28,2954.31) 4845.6,2954.31 ccw(c4864.91,2954.31) V1.1@4851.26,2940.66 ; V1.1@4845.6,2935 4845.6,2971.39 4857.6,2983.39 R53.2@4857.6,3115 ; R55.1@4846.99,3024.39 cw(c4821.39,2998.79) 4857.6,2998.79 cw(c4893.81,2998.79) R55.1@4868.21,3024.39 ; R55.1@4846.99,3045.61 ccw(c4821.39,3071.21) 4857.6,3071.21 ccw(c4893.81,3071.21) R55.1@4868.21,3045.61 ; R53.2@4846.99,3104.39 cw(c4821.39,3078.79) 4857.6,3078.79 cw(c4893.81,3078.79) R53.2@4868.21,3104.39
NetR56_2: R56.2 U17.5 | length 876.2
  Top Layer w15: U17.5@4329.21,3325.61 v1(4397.6,3325.61) ; v1@4392.3,3320.31 ccw(c4379.49,3307.51) 4379.49,3325.61 ccw(c4379.49,3343.72) v1@4392.3,3330.92
  Top Layer w20: R56.2@4857.6,3195 v1(4899.21,3195) ; R56.2@4870.71,3184.39 cw(c4896.31,3158.79) 4896.31,3195 cw(c4896.31,3231.21) R56.2@4870.71,3205.61
  Bottom Layer w15: v1@4397.6,3325 4886.21,3325 4899.21,3312 v1(4899.21,3195) ; v1@4402.9,3320.31 cw(c4414.22,3308.99) 4414.22,3325 ; v1@4402.9,3330.92 ccw(c4417.19,3345.2) 4417.19,3325 ; v1@4893.91,3200.3 ccw(c4881.11,3213.11) 4899.21,3213.11 ccw(c4917.32,3213.11) v1@4904.52,3200.3
NetR60_2: R60.2 U19.60 | length 347.1
  Top Layer w10: U19.60@3482.2,2690.87 3482.2,2817.2 3547.6,2882.6 R60.2@3547.6,2935 ; R60.2@3533.46,2918.36 cw(c3499.31,2884.22) 3547.6,2884.22 cw(c3595.88,2884.22) R60.2@3561.74,2918.36
NetR61_1: R61.1 U19.28 | length 219.4
  Top Layer w10: R61.1@3617.21,2091.64 ccw(c3583.06,2125.78) 3631.35,2125.78 ccw(c3679.63,2125.78) R61.1@3645.49,2091.64 ; U19.28@3620,2213.86 3620,2150 3631.35,2138.65 R61.1@3631.35,2075
NetR64_1: R64.1 U21.15 | length 2433.1
  Top Layer w15: v1@2274.7,3365.3 ccw(c2261.89,3378.11) 2280,3378.11 ccw(c2298.11,3378.11) 2285.3,3365.3 ccw(c2298.11,3378.11) 2298.11,3360 ccw(c2298.11,3341.89) v1@2285.3,3354.7 ; v1@2274.7,3669.7 cw(c2261.89,3656.89) 2280,3656.89 cw(c2298.11,3656.89) v1@2285.3,3669.7 ; v1(2280,3675) v1(2280,3360) R64.1@2328.05,3360 ; R64.1@2315.67,3347.63 ccw(c2285.8,3317.75) 2285.8,3360 ccw(c2285.8,3402.25) R64.1@2315.67,3372.37 ; v1(3690,3675) 3850,3675 3870,3655 3870,3495 3860.39,3485.39 U21.15@3799.21,3485.39 ; v1@3695.3,3669.7 cw(c3708.11,3656.89) 3708.11,3675 cw(c3708.11,3693.11) v1@3695.3,3680.3
  Bottom Layer w15: v1(2280,3675) v1(3690,3675) ; v1@2285.3,3669.7 cw(c2298.11,3656.89) 2298.11,3675 cw(c2298.11,3693.11) v1@2285.3,3680.3 ; v1@3684.7,3669.7 ccw(c3671.89,3656.89) 3671.89,3675 ccw(c3671.89,3693.11) v1@3684.7,3680.3
NetR64_2: R64.2 SM1.11 | length 1592.8
  Top Layer w15: R64.2@2315.67,3469.87 ccw(c2285.8,3499.75) 2328.05,3499.75 ccw(c2370.29,3499.75) R64.2@2340.42,3469.87 ; v1@2322.74,3993.53 cw(c2309.94,3980.73) 2328.05,3980.73 cw(c2346.15,3980.73) v1@2333.35,3993.53 ; R64.2@2328.05,3455 v1(2328.05,3998.83)
  Bottom Layer w15: v1(2328.05,3998.83) 2976.83,3998.83 2999.6,4021.6 SM1.11@2999.6,4181 ; v1@2333.35,3993.53 cw(c2346.15,3980.73) 2346.15,3998.83 cw(c2346.15,4016.94) v1@2333.35,4004.14 ; SM1.11@2983.69,4165.09 cw(c2945.28,4126.68) 2999.6,4126.68 cw(c3053.92,4126.68) SM1.11@3015.51,4165.09
NetR65_1: R65.1 U21.1 | length 1468.2
  Top Layer w15: R65.1@2505.34,3345.13 cw(c2475.46,3315.25) 2517.71,3315.25 cw(c2559.96,3315.25) R65.1@2530.09,3345.13 ; v1@2512.41,3311.09 ccw(c2499.61,3323.89) 2517.71,3323.89 ccw(c2535.82,3323.89) v1@2523.02,3311.09 ; v1(2517.71,3305.79) R65.1@2517.71,3360 ; v1(3434.61,3535.39) U21.1@3579.21,3535.39 ; v1@3439.92,3530.08 cw(c3452.72,3517.28) 3452.72,3535.39 cw(c3452.72,3553.49) v1@3439.92,3540.69
  Bottom Layer w15: v1@2512.41,3311.09 ccw(c2499.61,3323.89) 2517.71,3323.89 ccw(c2535.82,3323.89) v1@2523.02,3311.09 ; v1(2517.71,3305.79) 2517.71,3437.71 2545,3465 3270,3465 3340.39,3535.39 v1(3434.61,3535.39) ; v1@3429.31,3530.08 ccw(c3416.51,3517.28) 3416.51,3535.39 ccw(c3416.51,3553.49) v1@3429.31,3540.69
NetR65_2: R65.2 SM1.7 | length 1726.3
  Top Layer w15: R65.2@2505.34,3469.87 ccw(c2475.46,3499.75) 2517.71,3499.75 ccw(c2559.96,3499.75) R65.2@2530.09,3469.87 ; R65.2@2517.71,3455 2517.71,3977.71 2550,4010 3375,4010 3399.6,4034.6 SM1.7@3399.6,4181 ; SM1.7@3383.69,4165.09 cw(c3345.28,4126.68) 3399.6,4126.68 cw(c3453.92,4126.68) SM1.7@3415.51,4165.09
NetR66_1: R66.1 U21.2 | length 1056.1
  Top Layer w15: R66.1@2884.67,3345.13 cw(c2854.8,3315.25) 2897.05,3315.25 cw(c2939.29,3315.25) R66.1@2909.42,3345.13 ; v1@2891.74,3311.09 ccw(c2878.94,3323.89) 2897.05,3323.89 ccw(c2915.15,3323.89) v1@2902.35,3311.09 ; v1(2897.05,3305.79) R66.1@2897.05,3360 ; v1(3435.39,3485.39) U21.2@3579.21,3485.39 ; v1@3440.69,3480.08 cw(c3453.49,3467.28) 3453.49,3485.39 cw(c3453.49,3503.49) v1@3440.69,3490.69
  Bottom Layer w15: v1@2891.74,3311.09 ccw(c2878.94,3323.89) 2897.05,3323.89 ccw(c2915.15,3323.89) v1@2902.35,3311.09 ; v1(2897.05,3305.79) 2897.05,3417.05 2920,3440 3280,3440 3325.39,3485.39 v1(3435.39,3485.39) ; v1@3430.08,3480.08 ccw(c3417.28,3467.28) 3417.28,3485.39 ccw(c3417.28,3503.49) v1@3430.08,3490.69
NetR66_2: R66.2 SM1.4 | length 752.4
  Top Layer w15: R66.2@2884.67,3469.87 ccw(c2854.8,3499.75) 2897.05,3499.75 ccw(c2939.29,3499.75) R66.2@2909.42,3469.87 ; R66.2@2897.05,3455 2897.05,3599.05 2923,3625 3178,3625 3199.6,3646.6 SM1.4@3199.6,3781 ; SM1.4@3183.69,3765.09 cw(c3145.28,3726.68) 3199.6,3726.68 cw(c3253.92,3726.68) SM1.4@3215.51,3765.09
NetR67_1: R67.1 U21.3 | length 1453.9
  Top Layer w15: R67.1@2695,3345.13 cw(c2665.13,3315.25) 2707.38,3315.25 cw(c2749.63,3315.25) R67.1@2719.75,3345.13 ; v1@2702.08,3300.48 cw(c2689.27,3287.68) 2707.38,3287.68 cw(c2725.49,3287.68) v1@2712.68,3300.48 ; v1@2702.08,3311.09 ccw(c2689.27,3323.89) 2707.38,3323.89 ccw(c2725.49,3323.89) v1@2712.68,3311.09 ; R67.1@2707.38,3360 2707.38,3237.62 2725,3220 v1(3435,3220) ; v1@3429.7,3214.7 ccw(c3416.89,3201.89) 3416.89,3220 ccw(c3416.89,3238.11) v1@3429.7,3225.3 ; v1(3434.61,3435.39) U21.3@3579.21,3435.39 ; v1@3439.92,3430.08 cw(c3452.72,3417.28) 3452.72,3435.39 cw(c3452.72,3453.49) v1@3439.92,3440.69
  Bottom Layer w15: v1@3429.31,3430.08 cw(c3415.58,3416.35) 3435,3416.35 ; v1@3429.7,3225.3 ccw(c3416.89,3238.11) 3435,3238.11 ccw(c3453.11,3238.11) v1@3440.3,3225.3 ; v1(3435,3220) v1@3435,3435 ; 3435,3418.21 cw(c3451.79,3418.21) v1@3439.92,3430.08
  other v1: 2707.38,3305.79
NetR67_2: R67.2 SM1.2 | length 743.4
  Top Layer w15: R67.2@2695,3469.87 ccw(c2665.13,3499.75) 2707.38,3499.75 ccw(c2749.63,3499.75) R67.2@2719.75,3469.87 ; R67.2@2707.38,3455 2707.38,3649.38 2733,3675 2980,3675 2999.6,3694.6 SM1.2@2999.6,3781 ; SM1.2@2983.69,3765.09 cw(c2945.28,3726.68) 2999.6,3726.68 cw(c3053.92,3726.68) SM1.2@3015.51,3765.09
NetR68_1: R68.1 U21.4 | length 1508.5
  Top Layer w15: R68.1@2600.17,3345.13 cw(c2570.3,3315.25) 2612.55,3315.25 cw(c2654.79,3315.25) R68.1@2624.92,3345.13 ; R68.1@2612.55,3360 2612.55,3207.45 2634.61,3185.39 v1(3470.39,3185.39) ; v1@3465.08,3180.08 ccw(c3452.28,3167.28) 3452.28,3185.39 ccw(c3452.28,3203.49) v1@3465.08,3190.69 ; v1(3470.39,3385.39) U21.4@3579.21,3385.39 ; v1@3475.69,3380.08 cw(c3488.49,3367.28) 3488.49,3385.39 cw(c3488.49,3403.49) v1@3475.69,3390.69
  Bottom Layer w15: v1@3465.08,3190.69 ccw(c3452.28,3203.49) 3470.39,3203.49 ccw(c3488.49,3203.49) v1@3475.69,3190.69 ; v1@3465.08,3380.08 cw(c3452.28,3367.28) 3470.39,3367.28 cw(c3488.49,3367.28) v1@3475.69,3380.08 ; v1(3470.39,3185.39) v1(3470.39,3385.39)
NetR68_2: R68.2 SM1.1 | length 740.1
  Top Layer w15: R68.2@2600.17,3469.87 ccw(c2570.3,3499.75) 2612.55,3499.75 ccw(c2654.79,3499.75) R68.2@2624.92,3469.87 ; R68.2@2612.55,3455 2612.55,3675.55 2637,3700 2882,3700 2899.6,3717.6 SM1.1@2899.6,3781 ; SM1.1@2883.69,3765.09 cw(c2845.28,3726.68) 2899.6,3726.68 cw(c2953.92,3726.68) SM1.1@2915.51,3765.09
NetR70_1: R70.1 U21.5 | length 1719.5
  Top Layer w15: R70.1@2410.5,3345.13 cw(c2380.63,3315.25) 2422.88,3315.25 cw(c2465.13,3315.25) R70.1@2435.25,3345.13 ; R70.1@2422.88,3360 2422.88,3170.12 2442.61,3150.39 v1(3515.39,3150.39) ; v1@3510.08,3145.08 ccw(c3497.28,3132.28) 3497.28,3150.39 ccw(c3497.28,3168.49) v1@3510.08,3155.69 ; v1(3515.39,3335.39) U21.5@3579.21,3335.39 ; v1@3520.69,3330.08 cw(c3533.49,3317.28) 3533.49,3335.39 cw(c3533.49,3353.49) v1@3520.69,3340.69
  Bottom Layer w15: v1@3510.08,3155.69 ccw(c3497.28,3168.49) 3515.39,3168.49 ccw(c3533.49,3168.49) v1@3520.69,3155.69 ; v1@3510.08,3330.08 cw(c3497.28,3317.28) 3515.39,3317.28 cw(c3533.49,3317.28) v1@3520.69,3330.08 ; v1(3515.39,3150.39) v1(3515.39,3335.39)
NetR70_2: R70.2 SM1.10 | length 1596.7
  Top Layer w15: R70.2@2410.5,3469.87 ccw(c2380.63,3499.75) 2422.88,3499.75 ccw(c2465.13,3499.75) R70.2@2435.25,3469.87 ; v1@2417.58,3953.36 cw(c2404.77,3940.56) 2422.88,3940.56 cw(c2440.99,3940.56) v1@2428.18,3953.36 ; R70.2@2422.88,3455 v1(2422.88,3958.67)
  Bottom Layer w15: v1(2422.88,3958.67) 3074.67,3958.67 3099.6,3983.6 SM1.10@3099.6,4181 ; v1@2428.18,3953.36 cw(c2440.99,3940.56) 2440.99,3958.67 cw(c2440.99,3976.77) v1@2428.18,3963.97 ; SM1.10@3083.69,4165.09 cw(c3045.28,4126.68) 3099.6,4126.68 cw(c3153.92,4126.68) SM1.10@3115.51,4165.09
NetR72_1: R72.1 U21.6 | length 742.4
  Top Layer w15: R72.1@2979.5,3345.13 cw(c2949.63,3315.25) 2991.88,3315.25 cw(c3034.13,3315.25) R72.1@3004.25,3345.13 ; R72.1@2991.88,3360 2991.88,3283.12 3005,3270 3395,3270 3410.39,3285.39 U21.6@3579.21,3285.39
NetR72_2: R72.2 SM1.5 | length 757.5
  Top Layer w15: R72.2@2979.5,3469.87 ccw(c2949.63,3499.75) 2991.88,3499.75 ccw(c3034.13,3499.75) R72.2@3004.25,3469.87 ; R72.2@2991.88,3455 2991.88,3571.88 3020,3600 3280,3600 3299.6,3619.6 SM1.5@3299.6,3781 ; SM1.5@3283.69,3765.09 cw(c3245.28,3726.68) 3299.6,3726.68 cw(c3353.92,3726.68) SM1.5@3315.51,3765.09
NetR73_1: R73.1 U21.7 | length 963.8
  Top Layer w15: R73.1@2789.84,3345.13 cw(c2759.96,3315.25) 2802.21,3315.25 cw(c2844.46,3315.25) R73.1@2814.59,3345.13 ; R73.1@2802.21,3360 2802.21,3263.79 2821,3245 3405,3245 3420,3260 3500.39,3260 3525,3235.39 U21.7@3579.21,3235.39
NetR73_2: R73.2 SM1.3 | length 749.1
  Top Layer w15: R73.2@2789.84,3469.87 ccw(c2759.96,3499.75) 2802.21,3499.75 ccw(c2844.46,3499.75) R73.2@2814.59,3469.87 ; R73.2@2802.21,3455 2802.21,3625.21 2827,3650 3080,3650 3099.6,3669.6 SM1.3@3099.6,3781 ; SM1.3@3083.69,3765.09 cw(c3045.28,3726.68) 3099.6,3726.68 cw(c3153.92,3726.68) SM1.3@3115.51,3765.09
NetR92_1: R92.1 U9.3 | length 279.7
  Top Layer w15: R92.1@2061.21,1655 2100,1655 ; R92.1@2077.41,1644.1 cw(c2100,1626.13) 2100,1655 ; R92.1@2077.41,1665.9 ccw(c2100,1683.87) 2100,1655 ; U9.3@2247.6,1555 2200,1555 2100,1655
NRST: R87.1 U16.7 U19.7 | length 1817.4
  Top Layer w10: U19.7@3312.6,2481.89 v1(3385,2481.89) ; v1@3377.93,2474.82 ccw(c3360.86,2457.75) 3360.86,2481.89 ccw(c3360.86,2506.03) v1@3377.93,2488.96
  Top Layer w12: v1@2708.64,2488.25 ccw(c2693.27,2503.62) 2715,2503.62 ccw(c2736.73,2503.62) v1@2721.36,2488.25 ; v1@2708.64,2853.64 cw(c2693.27,2838.27) 2715,2838.27 cw(c2736.73,2838.27) v1@2721.36,2853.64 ; v1@2715,2480 v1(2715,2860)
  Top Layer w15: v1(2715,3009) 2824,3009 2843,3028 R87.1@2915.6,3028 ; v1@2720.3,3003.7 cw(c2733.11,2990.89) 2733.11,3009 cw(c2733.11,3027.11) v1@2720.3,3014.3 ; R87.1@2903.22,3015.63 ccw(c2873.35,2985.75) 2873.35,3028 ccw(c2873.35,3070.25) R87.1@2903.22,3040.37
  Bottom Layer w12: v1@2708.64,2866.36 ccw(c2693.27,2881.73) 2715,2881.73 ccw(c2736.73,2881.73) v1@2721.36,2866.36 ; v1@2708.64,3002.64 cw(c2693.27,2987.27) 2715,2987.27 cw(c2736.73,2987.27) v1@2721.36,3002.64 ; v1(2715,2481.89) v1(3385,2481.89) ; v1(2715,2860) v1(2715,3009) ; v1@2721.36,2475.53 cw(c2736.73,2460.16) 2736.73,2481.89 cw(c2736.73,2503.62) v1@2721.36,2488.25 ; v1@3378.64,2475.53 ccw(c3363.27,2460.16) 3363.27,2481.89 ccw(c3363.27,2503.62) v1@3378.64,2488.25
PK1: R10.1 U19.38 | length 270.5
  Top Layer w10: U19.38@3789.61,2403.15 3866.85,2403.15 3895,2375 R10.1@3972.6,2375 ; R10.1@3955.96,2360.86 ccw(c3921.81,2326.72) 3921.81,2375 ccw(c3921.81,2423.28) R10.1@3955.96,2389.14
PK2: R13.1 U19.37 | length 287.8
  Top Layer w10: U19.37@3789.61,2383.46 3836.54,2383.46 3925,2295 ; R13.1@3955.27,2281.57 ccw(c3925,2254.16) 3925,2295 ; R13.1@3955.27,2308.43 cw(c3925,2335.84) 3925,2295 ; R13.1@3972.6,2295 3925,2295
PSW1: R14.1 U19.24 | length 286.9
  Top Layer w10: R14.1@3470,2075 3470,2090 3541.26,2161.26 U19.24@3541.26,2213.86 ; R14.1@3470,2097.5 ccw(c3470,2115.61) 3482.8,2102.8 ; R14.1@3480,2077.5 cw(c3534.32,2077.5) 3495.91,2115.91 ; R14.1@3490,2077.5 cw(c3568.46,2077.5) 3512.98,2132.98
PSW2: R15.1 U19.25 | length 219.2
  Top Layer w10: R15.1@3535.86,2091.64 ccw(c3501.72,2125.78) 3550,2125.78 ccw(c3598.28,2125.78) R15.1@3564.14,2091.64 ; R15.1@3550,2075 3550,2135 3560.94,2145.94 U19.25@3560.94,2213.86